# Altium PCB PCB1.PcbDoc
Units mil, origin at the board's own origin, x right, y up, seen from the top; angles counter-clockwise.
Board outline 2500 x 2215 mil, 2 copper layers (Top Layer, Bottom Layer); 22 components, 12 nets, 50 pads, 0 vias.
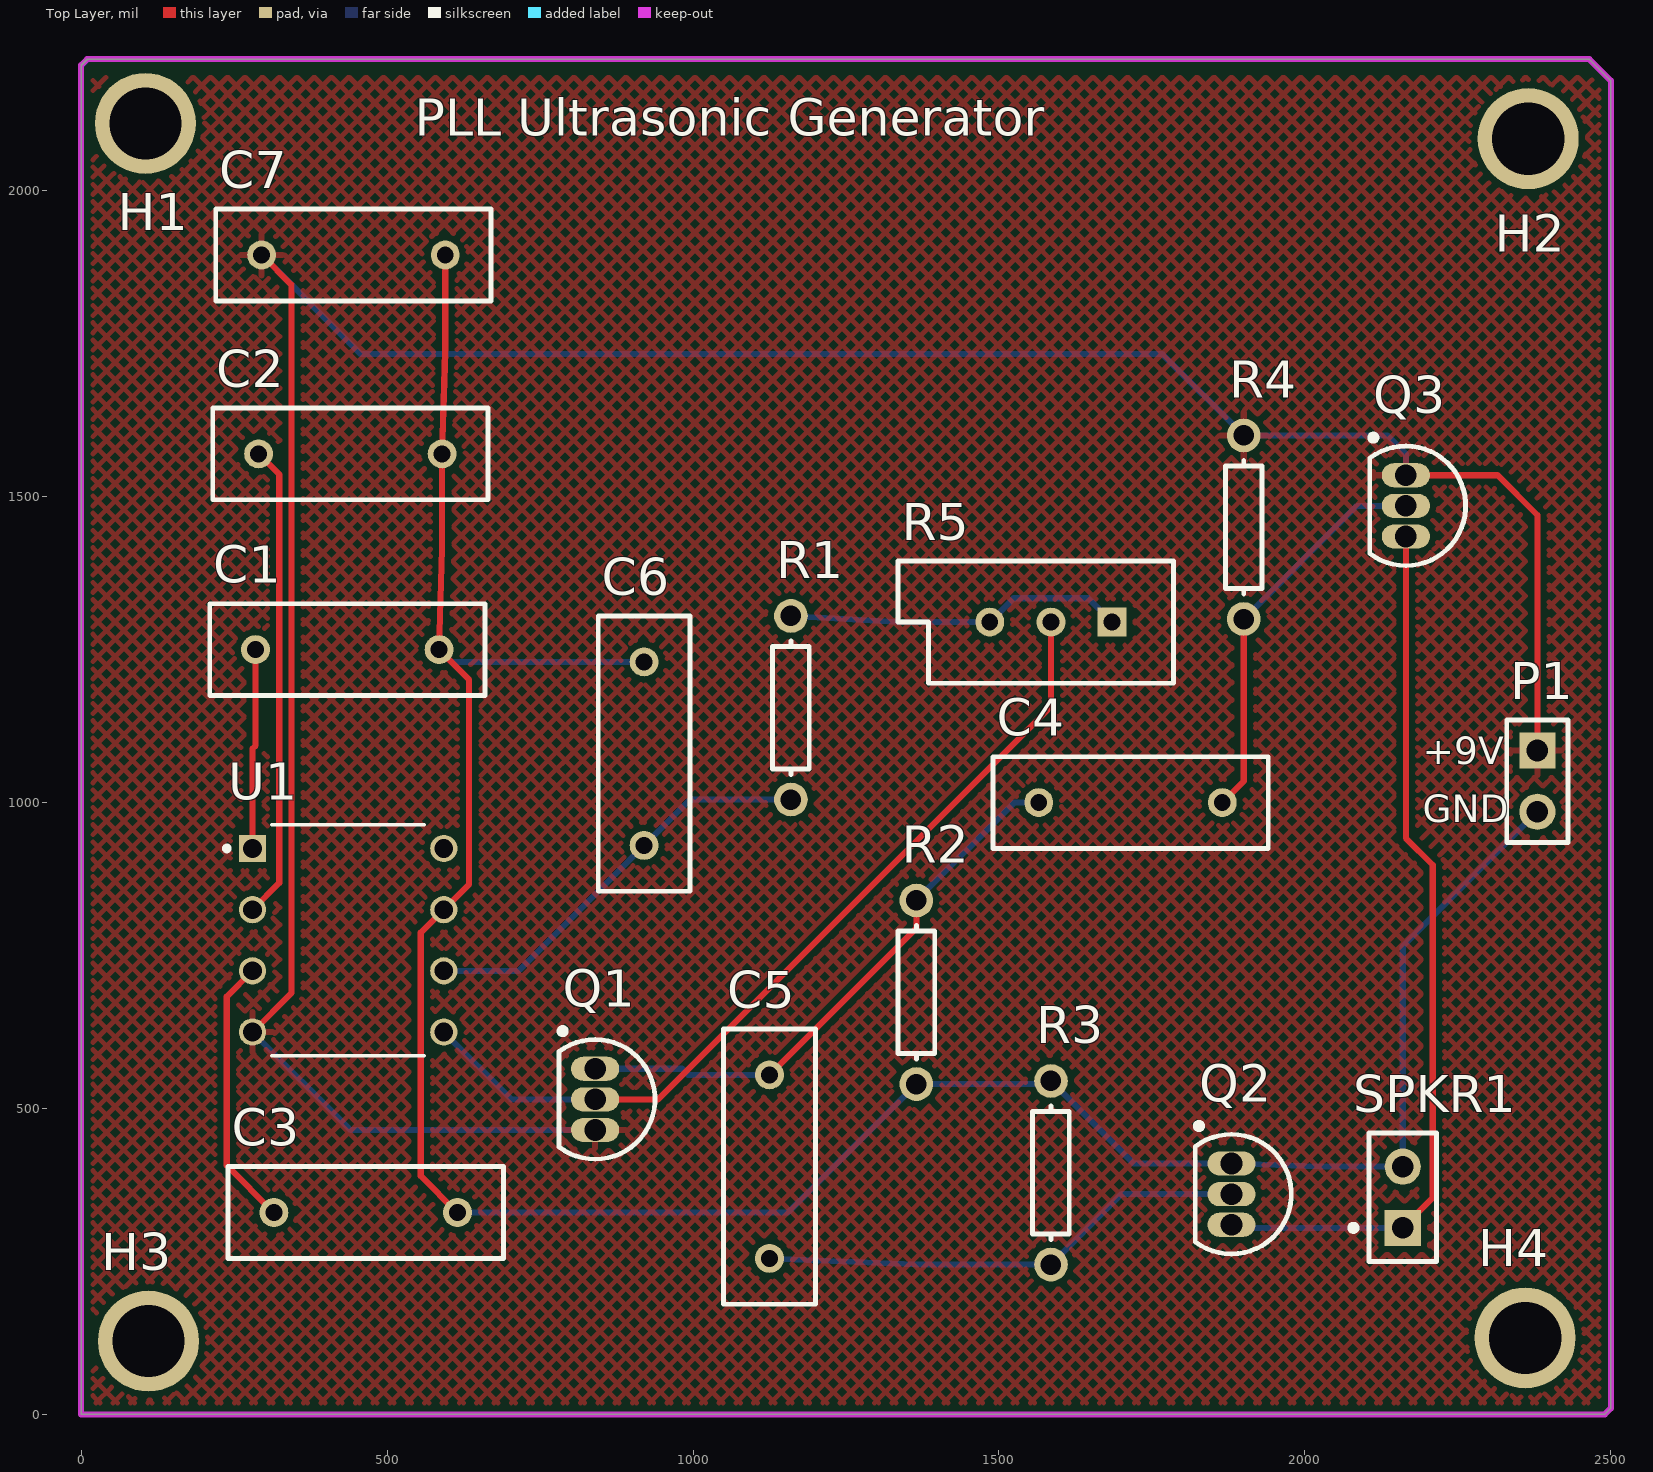
[diagram p0: Top Layer view]
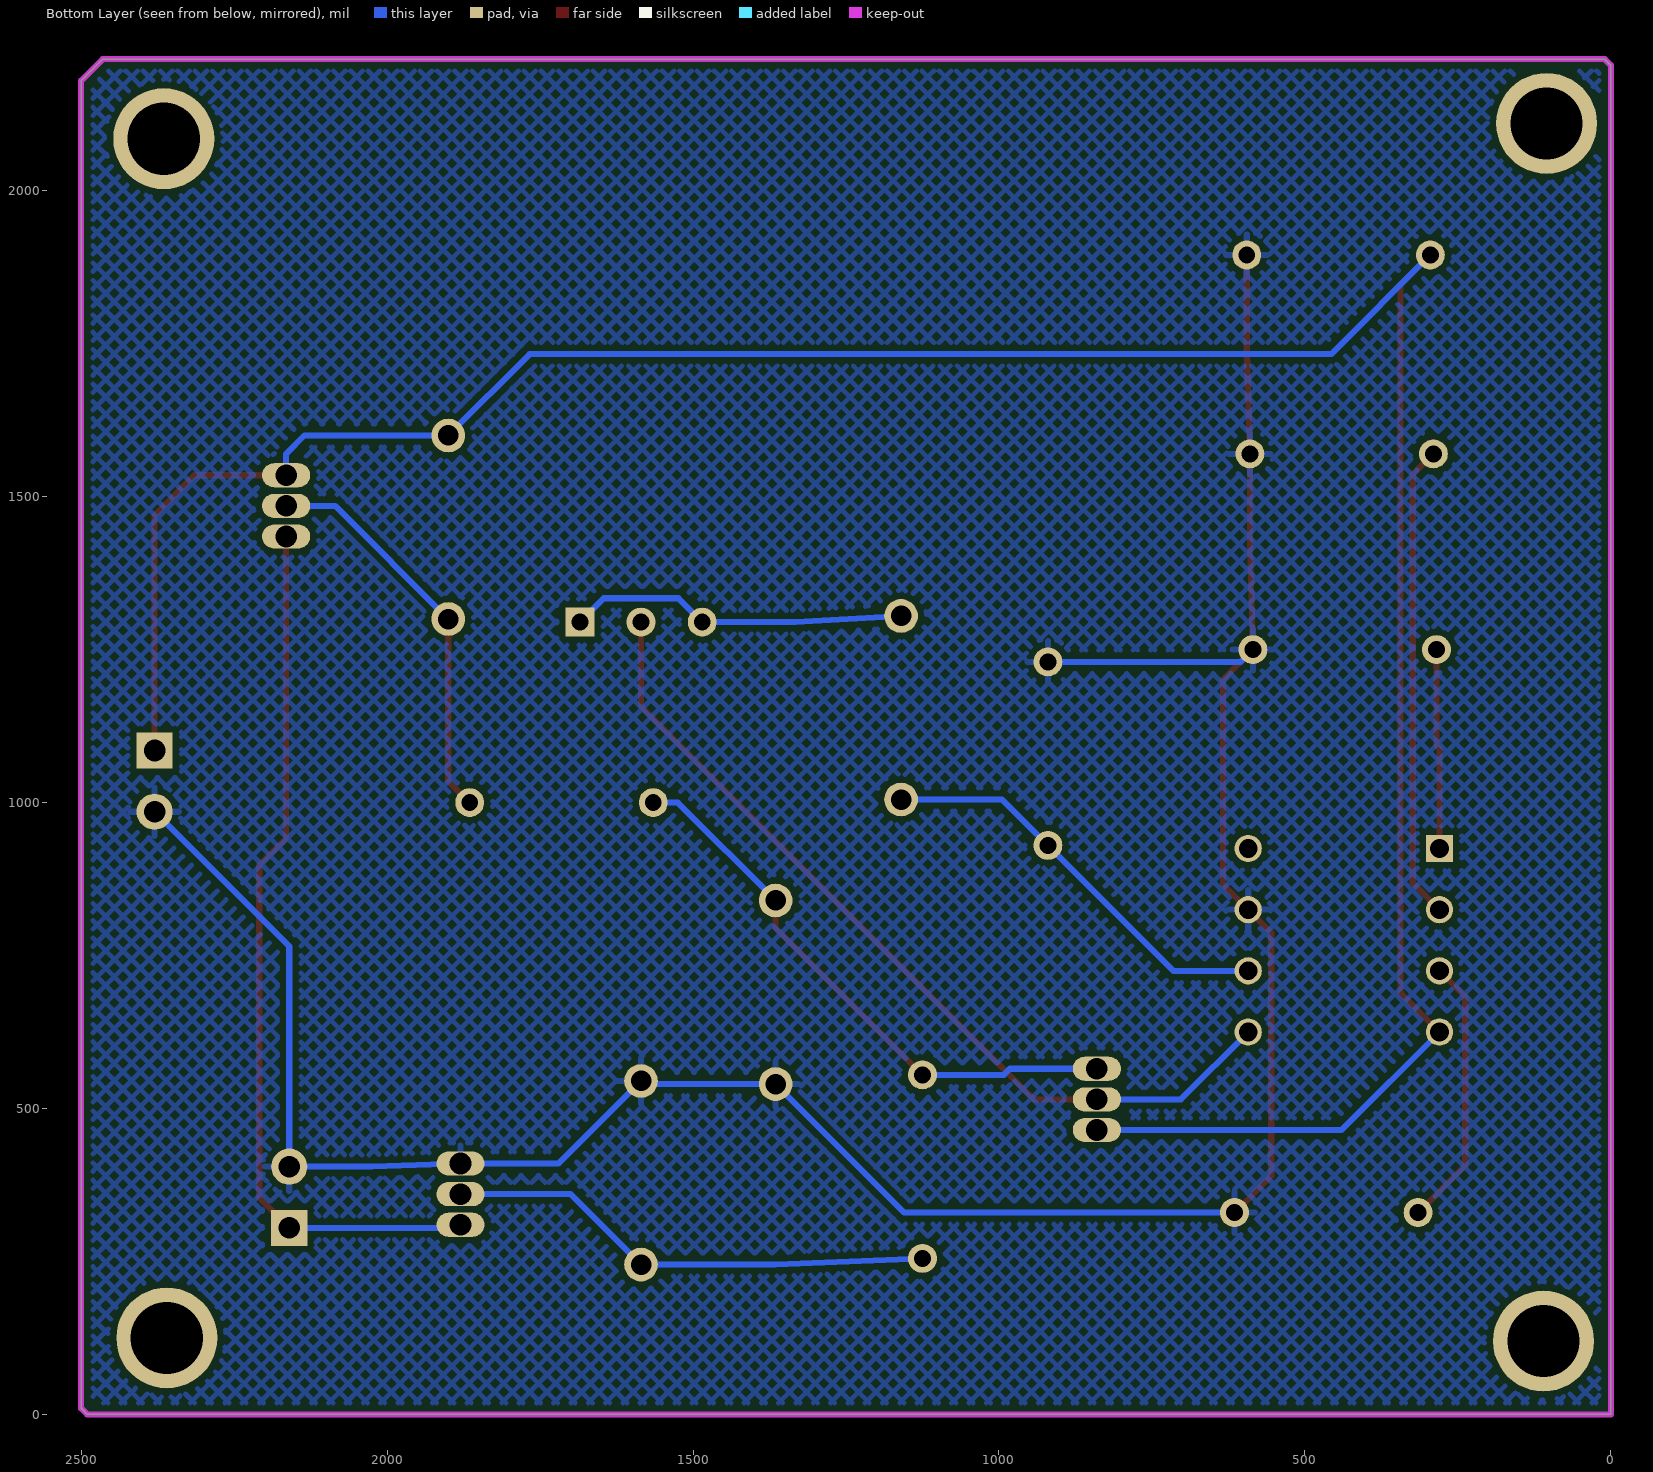
[diagram p1: Bottom Layer view, seen from below]

## Layer stack, top to bottom
Top Solder: solder mask 0.4, Solder Resist, Dk 3.5
Top Layer: signal copper 1.4
Dielectric 1: dielectric 12.6, FR-4, Dk 4.8
Bottom Layer: signal copper 1.4
Bottom Solder: solder mask 0.4, Solder Resist, Dk 3.5

## Board outline
0,0 2490,0 2500,10 2500,2180 2465,2215 10,2215 0,2205

## Design rules (kind name [scope] priority, off if disabled: settings)
Clearance [All] p1: gap=10 ignorepadtopadclearanceinfootprint=FALSE except(0: Arc-Hole Track-Hole SMDPad-Hole THPad-Hole Via-Hole Fill-Hole Poly-Hole Region-Hole Text-Hole)
PolygonConnect [All] p1: connectstyle=Relief reliefconductorwidth=10 reliefentries=4 polygonreliefangle="90 Angle" airgapwidth=10
RoutingVias [All] p1: holewidth=28 width=50 viastyle="Through Hole" minholewidth=28 minwidth=50 maxholewidth=28 maxwidth=50
SolderMaskExpansion [All] p1: expansion=4 istentingtop=FALSE
Width [All] p1: maxlimit=10 minlimit=10 preferedwidth=10
30 further rules are at their usual default settings.

## Components (designator, comment, footprint, x,y, rotation, side; value= is the part's Value field where it differs from the comment)
C1 "Cap Pol1" RAD-0.3 435,1250 r0 top value=0.1F
C2 "Cap Pol1" RAD-0.3 440,1570 r0 top value=0.1F
C3 "Cap Pol1" RAD-0.3 465,330 r0 top value=0.1F
C4 "Cap Pol1" RAD-0.3 1715,1000 r180 top value=0.1F
C5 "Cap Pol1" RAD-0.3 1125,405 r270 top value=0.1F
C6 "Cap Pol1" RAD-0.3 920,1080 r90 top value=0.001F
C7 "Cap Pol1" RAD-0.3 445,1895 r0 top value=470F
H1 "Hole 3mm" "Hole 3mm" 105,2110 r0 top
H2 "Hole 3mm" "Hole 3mm" 2365,2085 r0 top
H3 "Hole 3mm" "Hole 3mm" 110,120 r0 top
H4 "Hole 3mm" "Hole 3mm" 2360,125 r0 top
P1 "Power/GND" HDR1X2 2380,1085 r270 top
Q1 "2N3904" TO-92A 840,515 r180 top
Q2 "2N3904" TO-92A 1880,360 r180 top
Q3 "2N3906" TO-92A 2165,1485 r180 top
R1 "Res1" AXIAL-0.3 1160,1155 r90 top value=1K
R2 "Res1" AXIAL-0.3 1365,690 r270 top value=1K
R3 "Res1" AXIAL-0.3 1585,395 r270 top value=10K
R4 "Res1" AXIAL-0.3 1900,1450 r90 top value=10K
R5 "RPot" VR5 1585,1295 r180 top value=50K
SPKR1 "Speaker" PIN2 2160,305 r90 top
U1 "LM567CN/NOPB" DIP794W45P254L959H508Q8 436.3,775 r0 top

## Footprints (in the part's own frame and the unit in brackets; to place one, negate y for a bottom-side part, rotate by r counter-clockwise, add the part's x,y. Pads: shape width x height; smd on the part's side, far side on the other; paste and mask are expansions set on the pad)
AXIAL-0.3 [mm] "Axial Device, Thru-Hole; 2 Leads; 0.3 in Pin Spacing"
  round 1.4 hole 0.85: 1(-3.81,0) 2(3.81,0)
  silkscreen extent -2.77,-0.76 2.77,0.76
DIP794W45P254L959H508Q8 [mm]
  rect 1.13x1.13 hole 0.78: 1(-3.97,3.81)
  round 1.13 hole 0.78: 2(-3.97,1.27) 3(-3.97,-1.27) 4(-3.97,-3.81) 5(3.97,-3.81) 6(3.97,-1.27) 7(3.97,1.27) 8(3.97,3.81)
  silkscreen extent -5.13,-4.8 3.18,4.8
HDR1X2 [mm] "Connector; Header; 2 Position"
  rect 1.5x1.5 hole 0.9: 1(0,0)
  round 1.5 hole 0.9: 2(2.54,0)
  silkscreen extent -1.27,-1.27 3.81,1.27
"Hole 3mm" [mil]
  round 165 hole 118.11: 1(0,0)
PIN2 [mm] "Photosensitive Diode; 2 Leads"
  rect 1.5x1.5 hole 0.9: 1(0,0)
  round 1.5 hole 0.9: 2(2.54,0)
  silkscreen extent -1.4,-1.4 3.94,2.17
RAD-0.3 [mm] "Radial Cap, Thru-Hole; 2 Leads; 0.3 in Pin Spacing"
  round 1.2 hole 0.7: 1(-3.81,0) 2(3.81,0)
  silkscreen extent -5.71,-1.91 5.71,1.91
TO-92A [mm] "TO, Flat Index; 3 In-Line, Axial Leads; Body Dia. 4.5mm; Leads 0.51 x 0.48 mm (max)"
  oval 2x1 hole 0.9: 1(0,-1.27) 2(0,0) 3(0,1.27)
  silkscreen extent -2.48,-2.95 1.5,2.48, body extent -2.48,-2.5 1.5,2.5, height 6.86
VR5 [mm] "Thru-Hole; 3 Leads"
  rect 1.2x1.2 hole 0.7: 1(-2.54,0)
  round 1.2 hole 0.7: 2(0,0) 3(2.54,0)
  silkscreen extent -5.08,-2.54 6.35,2.54

## Part data
C1 C2 C3 C4 C5 C6 C7: "Polarized Capacitor (Radial)", LatestRevisionDate=17-Jul-2002, LatestRevisionNote="Re-released for DXP Platform.", PackageDescription="Polarized Capacitor (Radial); 2 Leads", PackageReference=RB7.6-15, Published=8-Jun-2000, Publisher="Altium Limited"
P1: library part "Header 2", "Header, 2-Pin", LatestRevisionDate=17-Jul-2002, LatestRevisionNote="Re-released for DXP Platform.", Publisher="Altium Limited"
Q1 Q2: "NPN General Purpose Amplifier", ComponentLink1Description="Manufacturer Link", ComponentLink1URL=http://www.fairchildsemi.com/, ComponentLink2Description=Datasheet, ComponentLink2URL=http://www.fairchildsemi.com/ds/2N%2F2N3904.pdf, DatasheetVersion=1997, LatestRevisionDate=15-Jan-2003, LatestRevisionNote="PCB Footprint 'BCY-W3/D4.7' replaced", PackageDescription="TO, Flat Index; 3 In-Line, Axial Leads; Body Dia. 4.5mm; Leads 0.51 x 0.48 mm (max)", PackageReference=TO-92A, PackageVersion=Sep-1998, Published=8-Jun-2000, Publisher="Altium Limited"
Q3: "PNP General Purpose Amplifier", ComponentLink1Description="Manufacturer Link", ComponentLink1URL=http://www.fairchildsemi.com/, ComponentLink2Description=Datasheet, ComponentLink2URL=http://www.fairchildsemi.com/ds/2N%2F2N3906.pdf, DatasheetVersion=1997, LatestRevisionDate=15-Jan-2003, LatestRevisionNote="PCB Footprint 'BCY-W3/D4.7' replaced", PackageDescription="TO, Flat Index; 3 In-Line, Axial Leads; Body Dia. 4.5mm; Leads 0.51 x 0.48 mm (max)", PackageReference=TO-92A, PackageVersion=Sep-1998, Published=8-Jun-2000, Publisher="Altium Limited"
R1 R2 R3 R4: "Resistor", LatestRevisionDate=17-Jul-2002, LatestRevisionNote="Re-released for DXP Platform.", PackageDescription="Axial Device, Thru-Hole; 2 Leads; 0.3 in Pin Spacing", PackageReference=AXIAL-0.3, Published=8-Jun-2000, Publisher="Altium Limited"
R5: "Potentiometer", LatestRevisionDate=17-Jul-2002, LatestRevisionNote="Re-released for DXP Platform.", PackageDescription="Variable Resistor, Thru-Hole; 3 Leads", PackageReference=VR5, Published=8-Jun-2000, Publisher="Altium Limited", Set Position=0.5, Sim Note="Enter the Resistance value and the set point into parameter fields."
SPKR1: "Loudspeaker", LatestRevisionDate=17-Jul-2002, LatestRevisionNote="Re-released for DXP Platform.", PackageReference=PIN2, Published=24-Mar-1999, Publisher="Altium Limited"
U1: "Telecom IC Tone Decoder 8-PDIP", Package="DIP-8 Texas Instruments", Availability=Unavailable, MF="Texas Instruments", MP=LM567CN, Price=None, SnapEDA_Link=https://www.snapeda.com/parts/LM567CN/Texas%20Instruments/view-part/383132/?ref=snap

## Nets (pads, with @x,y where several pads share a name; then routed paths per layer and width w, separated by ;. In a path a pad name is that pad's centre, name@x,y a point inside that pad or via, vN(x,y) a via of type N, cw(c..) or ccw(c..) an arc to the next point about the centre after c; other vN are vias at no path point)
+9V: C7.1 P1.1 Q1.3 Q3.1 R4.2 U1.4 | length 4609.3
  Top Layer w10: U1.4 343.62,688.62 343.62,1846.38 C7.1 ; Q3.1 2315,1535 2380,1470 P1.1
  Bottom Layer w10: U1.4 440,465 Q1.3 ; C7.1 457,1733 1767,1733 R4.2 2135,1600 2165,1570 Q3.1
GND: C1.2 C2.2 C3.2 C6.2 C7.2 P1.2 Q2.1 R2.2 R3.1 SPKR1.2 U1.7 | length 4347.5
  Top Layer w10: C7.2 595,1738 C2.2 590,1415 C1.2 634,1201 634,866.4 U1.7 555,787.4 555,390 C3.2
  Bottom Layer w10: C1.2 605,1230 C6.2 ; C3.2 1155,330 R2.2 1580,540 R3.1 1720,410 Q2.1 2025,405 SPKR1.2 2160,765 P1.2
NetC1_1: C1.1 U1.1 | length 327.1
  Top Layer w10: U1.1 280,1088 285,1093 C1.1
NetC2_1: C2.1 U1.2 | length 777
  Top Layer w10: U1.2 323.62,868.62 323.62,1536.38 C2.1
NetC3_1: C3.1 U1.3 | length 444.3
  Top Layer w10: U1.3 238,683 238,407 C3.1
NetC4_1: C4.1 Q3.2 R4.1 | length 656.1
  Top Layer w10: C4.1 1900,1035 R4.1
  Bottom Layer w10: R4.1 2085,1485 Q3.2
NetC4_2: C4.2 C5.1 Q1.1 R2.1 | length 939.8
  Top Layer w10: C5.1 1365,795 R2.1
  Bottom Layer w10: Q1.1 982,565 992,555 C5.1 ; R2.1 1525,1000 C4.2
NetC5_2: C5.2 Q2.2 R3.2 | length 802.8
  Bottom Layer w10: C5.2 1365,245 R3.2 1700,360 Q2.2
NetC6_1: C6.1 R1.1 U1.6 | length 683.4
  Bottom Layer w10: U1.6 715,725 C6.1 995,1005 R1.1
NetQ1_2: Q1.2 R5.2 U1.5 | length 1441.9
  Top Layer w10: Q1.2 943,515 1585,1157 R5.2
  Bottom Layer w10: U1.5 702.6,515 Q1.2
NetQ2_3: Q2.3 Q3.3 SPKR1.1 | length 1450.6
  Top Layer w10: SPKR1.1 2209,354 2209,898 2165,942 Q3.3
  Bottom Layer w10: Q2.3 1885,305 SPKR1.1
NetR1_2: R1.2 R5.1 R5.3 | length 557.6
  Bottom Layer w10: R1.2 1333,1295 R5.3 1524,1334 1646,1334 R5.1
pads on no net: H1.1 H2.1 H3.1 H4.1 U1.8

## Polygon pours and split planes (outlines as drawn)
GND on Bottom Layer "GND_L02_P001" (hatched 45Degree grid 20 track 8, pour order 1): 0,15 2490,15 2490,2200 2475,2215 5,2215 5,20
+9V on Top Layer "+9V_L01_P002" (hatched 45Degree grid 20 track 8, pour order 2): 5,2200 20,2185 2465,2185 2490,2160 2490,0 20,0 5,15 5,2195

## Keep-outs
Keep-Out Layer:
  the board outline again, w10

## Silkscreen, mask and mechanical layers (free items; w line width, h text height)
Top Overlay:
  text "PLL Ultrasonic Generator" at 545,2090 h60
  text "+9V" at 2193,1063 h45
  text "GND" at 2193,968 h45